# EAGLE board a (EAGLE 6.2)
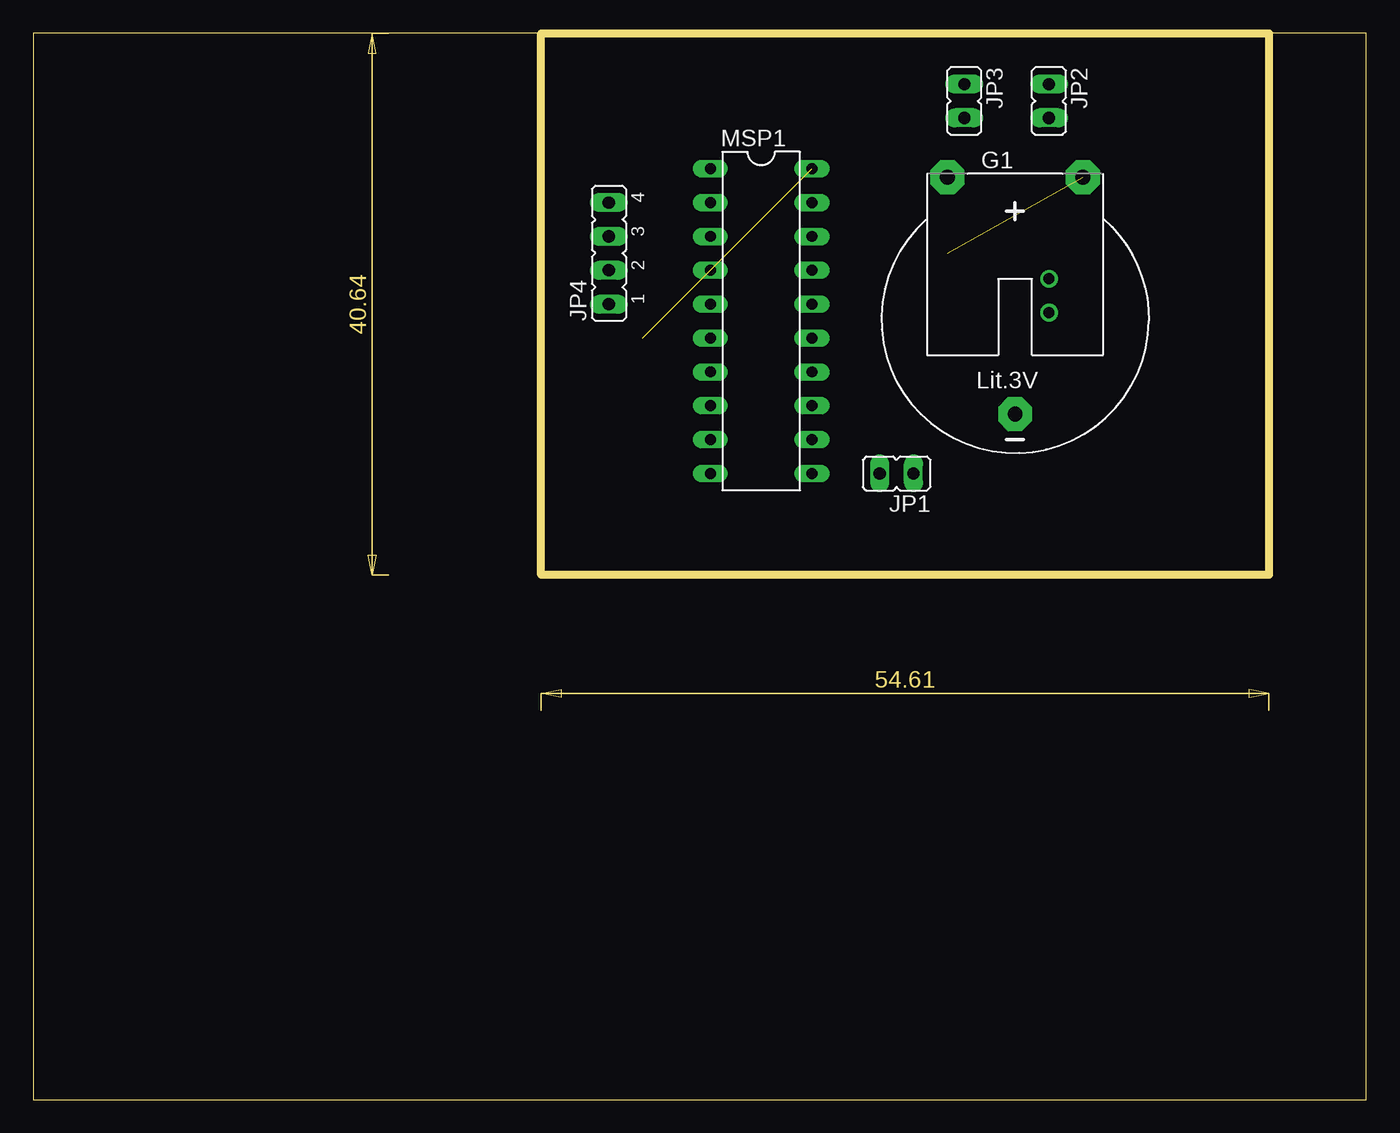
[diagram p0: board, top side]
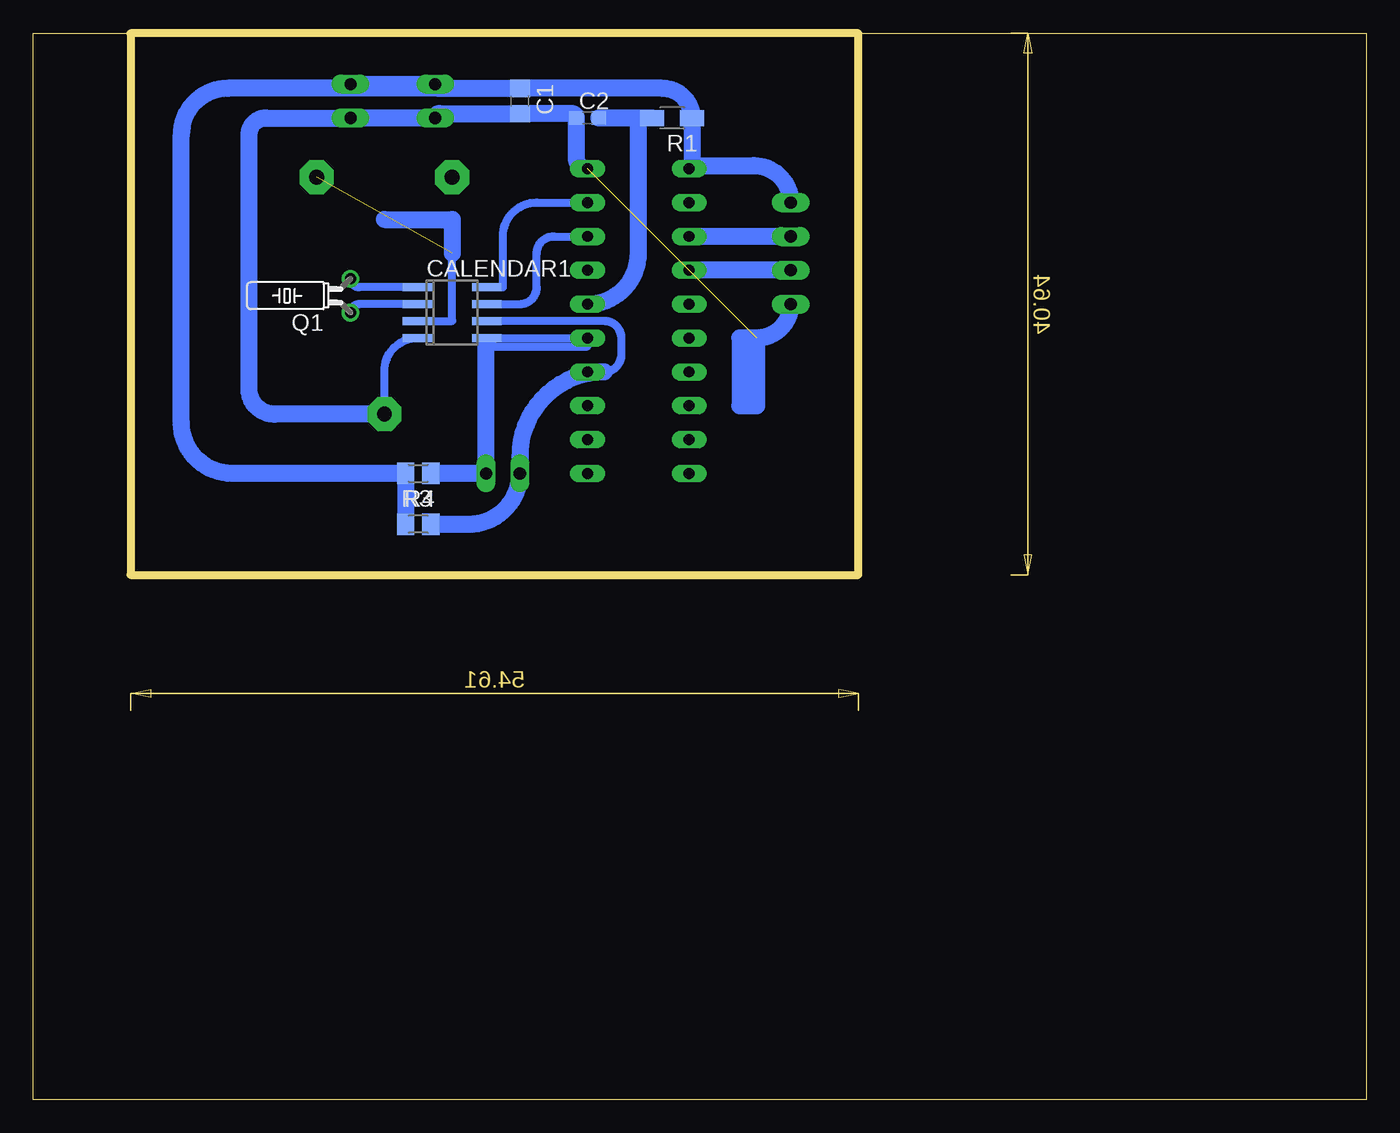
[diagram p1: board, bottom side, seen from below]

Size 100 x 80.01 mm. Coordinates in mm from the lower left corner, seen from the top.
Outline: 0,0 100,0 100,80 0,80 0,0
Outline: 92.71,80.01 92.71,39.37 38.1,39.37 38.1,80.01 92.71,80.01
Copper layers (1*16): Top 0.035mm / dielectric 1.5mm / Bottom 0.035mm
Design rules: minimum track width 10mil, minimum drill 24mil, track to track 8mil, track to pad 8mil, pad to pad 8mil, via to via 8mil, smd to smd 8mil, copper to edge 40mil, drill to drill 8mil, minimum pad ring 10mil, minimum via ring 8mil, stop-mask expansion 4mil, vias tented up to drill 0mil, thermal gap 10mil

## Footprints (pad centres in the part's own frame; a part is rotated, then mirrored left to right if it is on the bottom)
C0805 = smd 1.3 x 1.5: 1 -0.95,0; 2 0.95,0
C0603 = smd 1.1 x 1: 1 -0.85,0; 2 0.85,0
SO-08 = smd 0.6 x 2.2: 1 -1.905,-2.6; 2 -0.635,-2.6; 3 0.635,-2.6; 4 1.905,-2.6; 5 1.905,2.6; 6 0.635,2.6; 7 -0.635,2.6; 8 -1.905,2.6
CR2032H = drill 1.118 pad 2.54 octagon: + 5.08,10.795; +@1 -5.08,10.795; - 0,-6.985
JP1 = drill 0.914 long: 1 0,-1.27; 2 0,1.27
JP4 = drill 0.914 long: 1 -3.81,0; 2 -1.27,0; 3 1.27,0; 4 3.81,0
DIL20 = drill 0.813 long: 1 -11.43,-3.81; 2 -8.89,-3.81; 3 -6.35,-3.81; 4 -3.81,-3.81; 5 -1.27,-3.81; 6 1.27,-3.81; 7 3.81,-3.81; 8 6.35,-3.81; 9 8.89,-3.81; 10 11.43,-3.81; 11 11.43,3.81; 12 8.89,3.81; 13 6.35,3.81; 14 3.81,3.81; 15 1.27,3.81; 16 -1.27,3.81; 17 -3.81,3.81; 18 -6.35,3.81; 19 -8.89,3.81; 20 -11.43,3.81
TC26H = drill 0.813: 1 -1.27,0; 2 1.27,0
R1206W = smd 1.8 x 1.2: 1 -1.499,0; 2 1.499,0
M0805 = smd 1.3 x 1.6: 1 -0.95,0; 2 0.95,0

## Placement (x,y rotation side)
C1  100nF  [C0805]  63.5,74.93 270 bottom
C2  1nF  [C0603]  58.42,73.66 0 bottom
CALENDAR1  DS1338Z33SO8  [SO-08]  68.58,59.05 270 bottom
G1  CR2032H  [CR2032H]  73.66,58.42 0 top
JP1  [JP1]  64.77,46.99 90 top
JP2  [JP1]  76.2,74.93 180 top
JP3  [JP1]  69.85,74.93 180 top
JP4  [JP4]  43.18,63.5 90 top
MSP1  MSP430G2553  [DIL20]  54.61,58.42 270 top
Q1  32687  [TC26H]  76.2,60.33 90 bottom
R1  47k  [R1206W]  52.07,73.66 180 bottom
R3  10k  [M0805]  71.12,43.18 0 bottom
R4  10k  [M0805]  71.12,46.99 180 bottom

## Library data of the parts
C1 C2 R1 R3 R4 = rcl
CALENDAR1 = ds1338
G1 = battery
JP1-JP4 = jumper
MSP1 = msp430g2553
Q1 = crystal; OC_FARNELL: unknown; OC_NEWARK: unknown

## Nets
+3V3: C1.1 JP2.1 JP3.1 JP4.4 MSP1.1 R1.1 R3.1 R4.2
GND: C1.2 C2.1 CALENDAR1.4 G1.- JP2.2 JP3.2 JP4.1 MSP1.20
N$1: CALENDAR1.7 MSP1.18
N$2: C2.2 MSP1.16 R1.2
N$4: CALENDAR1.6 JP1.2 MSP1.14 R3.2
N$5: CALENDAR1.1 Q1.2
N$6: CALENDAR1.2 Q1.1
N$7: JP4.3 MSP1.3
N$8: JP4.2 MSP1.4
N$9: CALENDAR1.5 JP1.1 MSP1.15 R4.1
VBAT: CALENDAR1.3 G1.+
VCC: CALENDAR1.8 MSP1.19

## Tracks (layer width: path | path; a pad name or v marks a point on that pad's centre or on a via)
+3V3
  Bottom 1.27: 50.57,70.08 R1.1 arc-90 52.79,75.88 C1.1 69.53,75.88 | 50.57,70.08 arc90 MSP1.1 | 69.53,75.88 arc90 JP3.1 JP2.1 | 69.53,75.88 85.41,75.88 arc-90 88.9,72.39 88.9,50.8 arc-90 85.09,46.99 R4.2 R3.1 | 50.57,70.08 45.95,70.08 arc90 JP4.4
GND  (1 unrouted)
  Bottom 0.61: G1.- 73.66,54.67 arc90 CALENDAR1.4
  Bottom 1.27: MSP1.20 arc90 59.27,70.7 C2.1 arc-90 59.59,73.98 C1.2 69.53,73.98 arc-90 JP3.2 JP2.2 82.55,73.66 arc-90 83.82,72.39 83.82,53.34 arc-90 81.92,51.44 G1.- | JP4.1 arc90 45.72,57.15 | 45.72,57.15 46.99,57.15 46.99,52.07 45.72,52.07 45.72,57.15
N$1
  Bottom 0.61: CALENDAR1.7 63.5,59.69 arc-90 62.23,60.96 62.23,63.5 arc90 60.96,64.77 MSP1.18
N$2
  Bottom 1.27: R1.2 54.61,73.66 | 54.61,73.66 C2.2 | MSP1.16 arc-90 54.61,63.5 54.61,73.66
N$4
  Bottom 0.61: MSP1.14 57.15,54.61 arc-90 55.88,55.88 55.88,57.15 arc-90 57.15,58.42 CALENDAR1.6
  Bottom 1.27: R3.2 67.31,43.18 arc-90 JP1.2 63.5,48.26 arc90 57.15,54.61
N$5
  Bottom 0.61: CALENDAR1.1 75.56,60.96 arc90 Q1.2
N$6
  Bottom 0.61: CALENDAR1.2 75.56,59.69 arc-90 Q1.1
N$7
  Bottom 1.27: JP4.3 MSP1.3
N$8
  Bottom 1.27: JP4.2 MSP1.4
N$9
  Bottom 0.61: 66.04,57.15 65.41,56.52 58.42,56.52 MSP1.15 CALENDAR1.5 65.98,47.05 arc90 JP1.1
  Bottom 1.27: R4.1 JP1.1 66.04,56.52
VBAT  (1 unrouted)
  Bottom 0.61: CALENDAR1.3 68.58,58.42 68.58,63.5
  Bottom 1.27: 73.66,66.04 68.58,66.04 68.58,63.5
VCC
  Bottom 0.61: CALENDAR1.8 64.77,60.96 64.77,64.77 arc90 62.23,67.31 MSP1.19